# EAGLE board actualpanelDUALLM13700VCA (EAGLE 9.6.2)
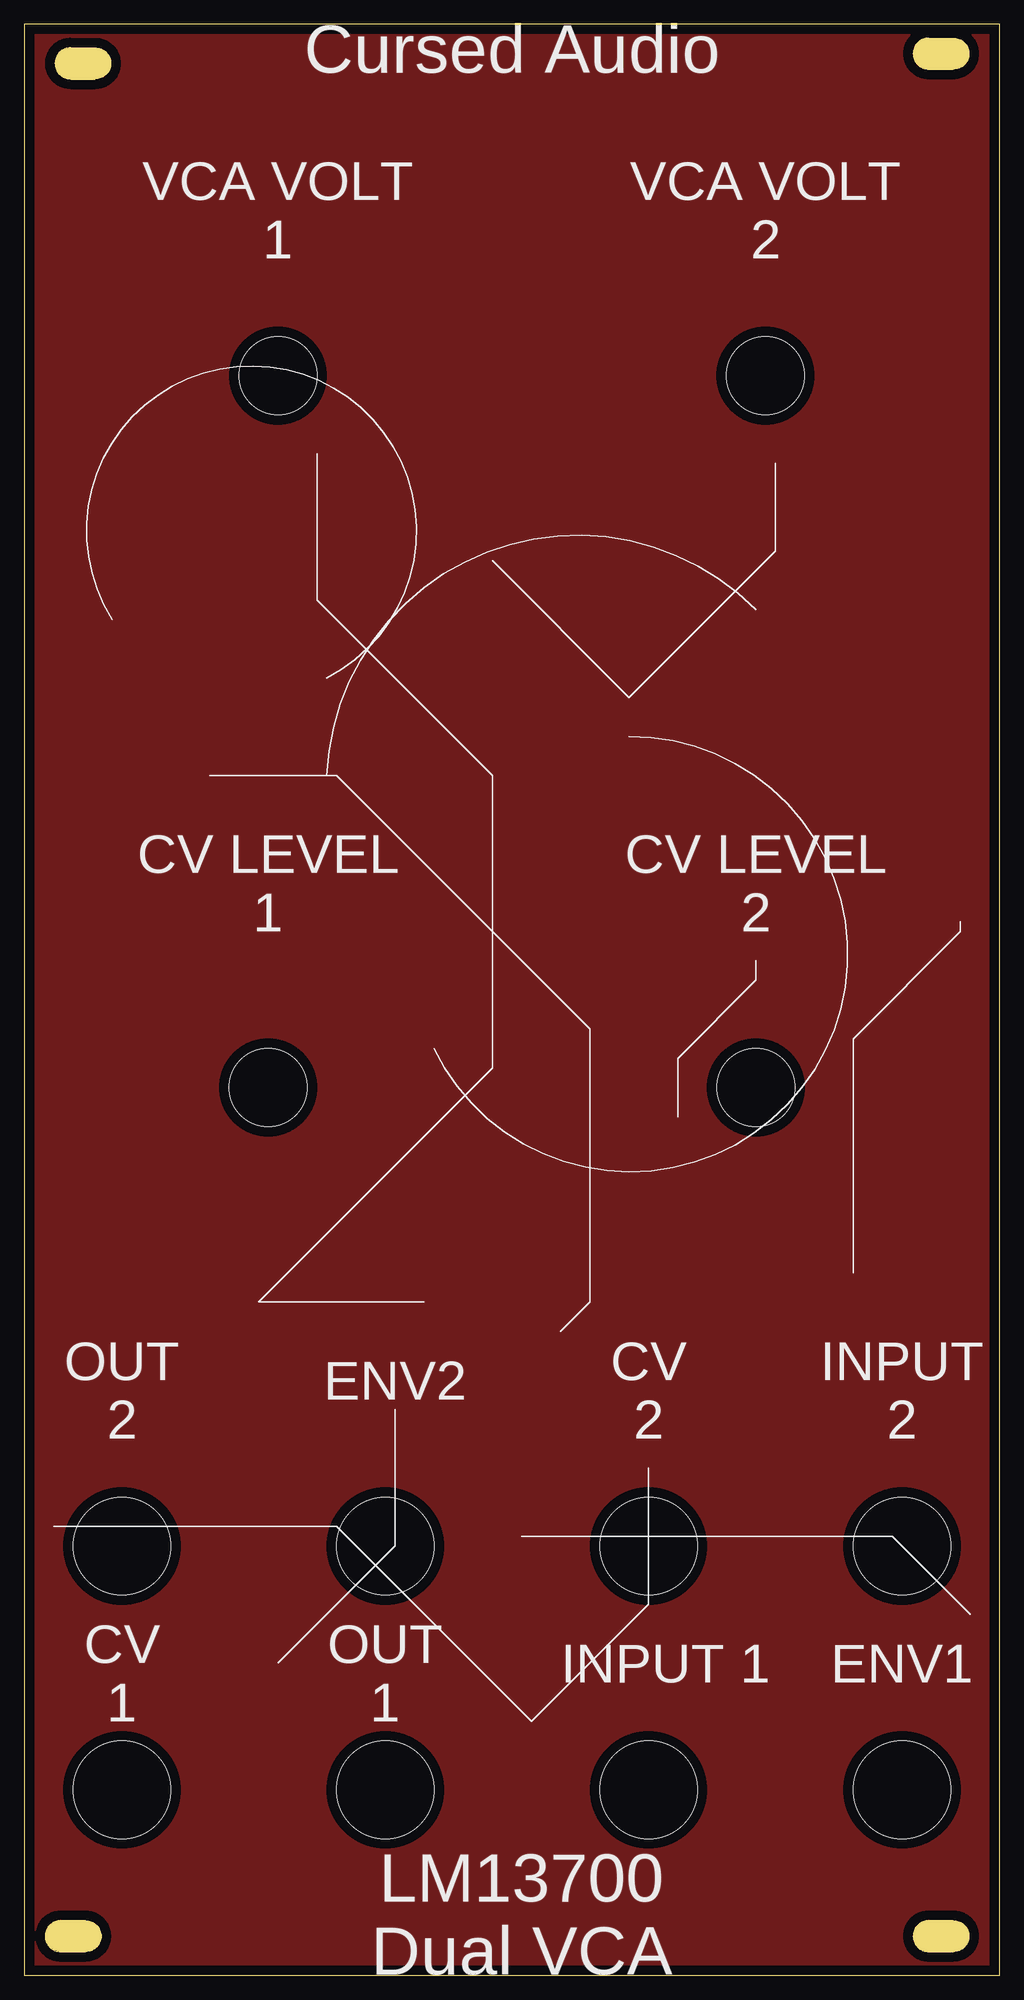
[diagram p0: board, top side]
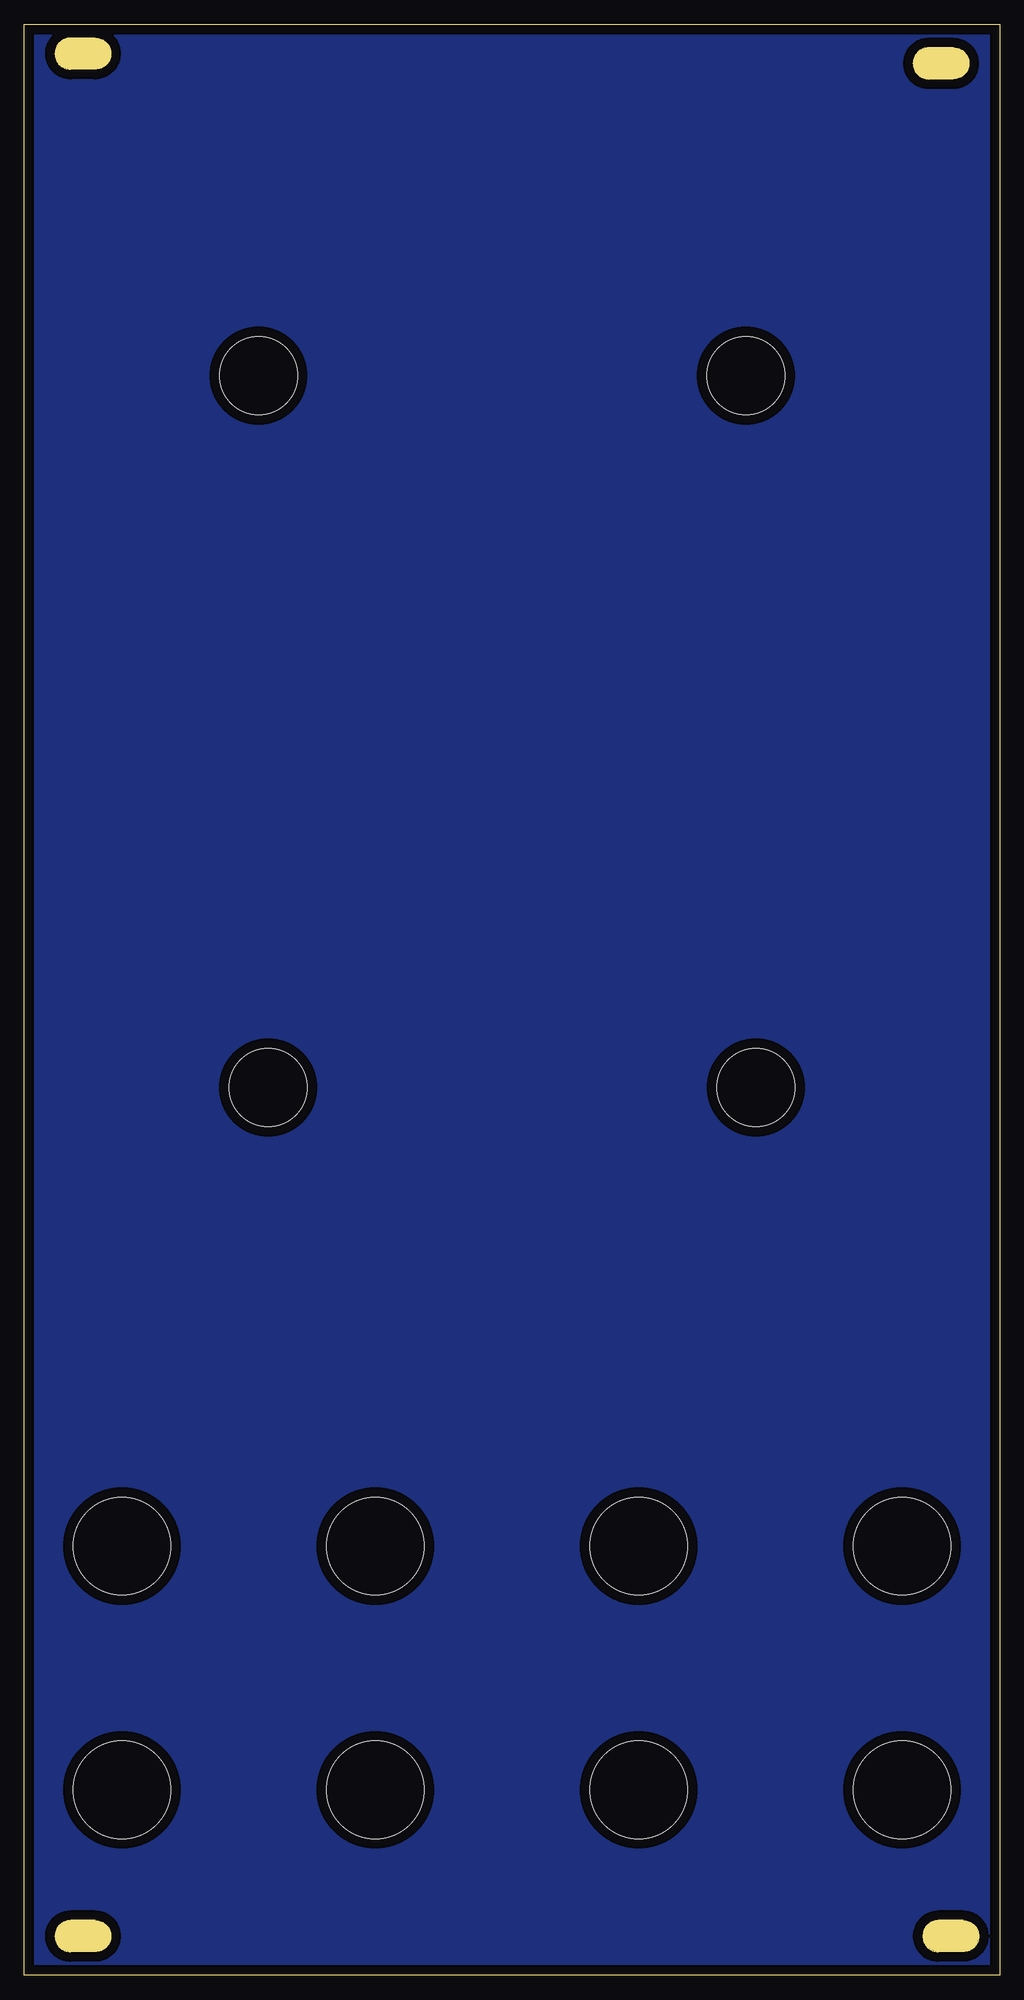
[diagram p1: board, bottom side, seen from below]

Size 100 x 200 mm. Coordinates in mm from the lower left corner, seen from the top.
Outline: 0,0 100,0 100,200 0,200 0,0
Copper layers (1*16): Top 0.035mm / dielectric 1.5mm / Bottom 0.035mm
Design rules "default": minimum track width 6mil, minimum drill 0.35mm, track to track 6mil, track to pad 6mil, pad to pad 6mil, via to via 6mil, smd to smd 6mil, copper to edge 40mil, drill to drill 6mil, minimum pad ring 10mil, minimum via ring 8mil, stop-mask expansion 4mil, vias tented up to drill 0mil, thermal gap 10mil
Net classes: 0 default: width 0.508 mm
Holes 8 mm at 25,91 75,91 26,164 76,164
Holes 10 mm at 10,44 37,44 64,44 90,44 10,19 37,19 64,19 90,19

## Placement (x,y rotation side)
U$1  [SLOT_HOLE]  6,196 0 top
U$2  [SLOT_HOLE]  94,197 0 top
U$3  [SLOT_HOLE]  94,4 0 top
U$4  [SLOT_HOLE]  5,4 0 top

## Library data of the parts
U$1-U$4 = MusicThingModular

## Tracks (layer width: path | path; a pad name or v marks a point on that pad's centre or on a via)
GND
  pour Top: 0,0 0,200 100,200 100,0
  pour Bottom: 0,200 100,200 100,0 0,0

## Text on the board
tPlace: Cursed Audio | VCA VOLT / 1 | VCA VOLT / 2 | CV LEVEL / 1 | CV LEVEL / 2 | ENV2 | OUT / 2 | CV / 2 | INPUT / 2 | INPUT 1 | ENV1 | CV / 1 | OUT / 1 | LM13700 / Dual VCA